# Altium PCB TPcape_breakout.PcbDoc
Units mil, origin at the board's own origin, x right, y up, seen from the top; angles counter-clockwise.
Board outline 2875.01 x 2150.01 mil, 2 copper layers (Top Layer, Bottom Layer); 13 components, 47 nets, 232 pads, 0 vias.
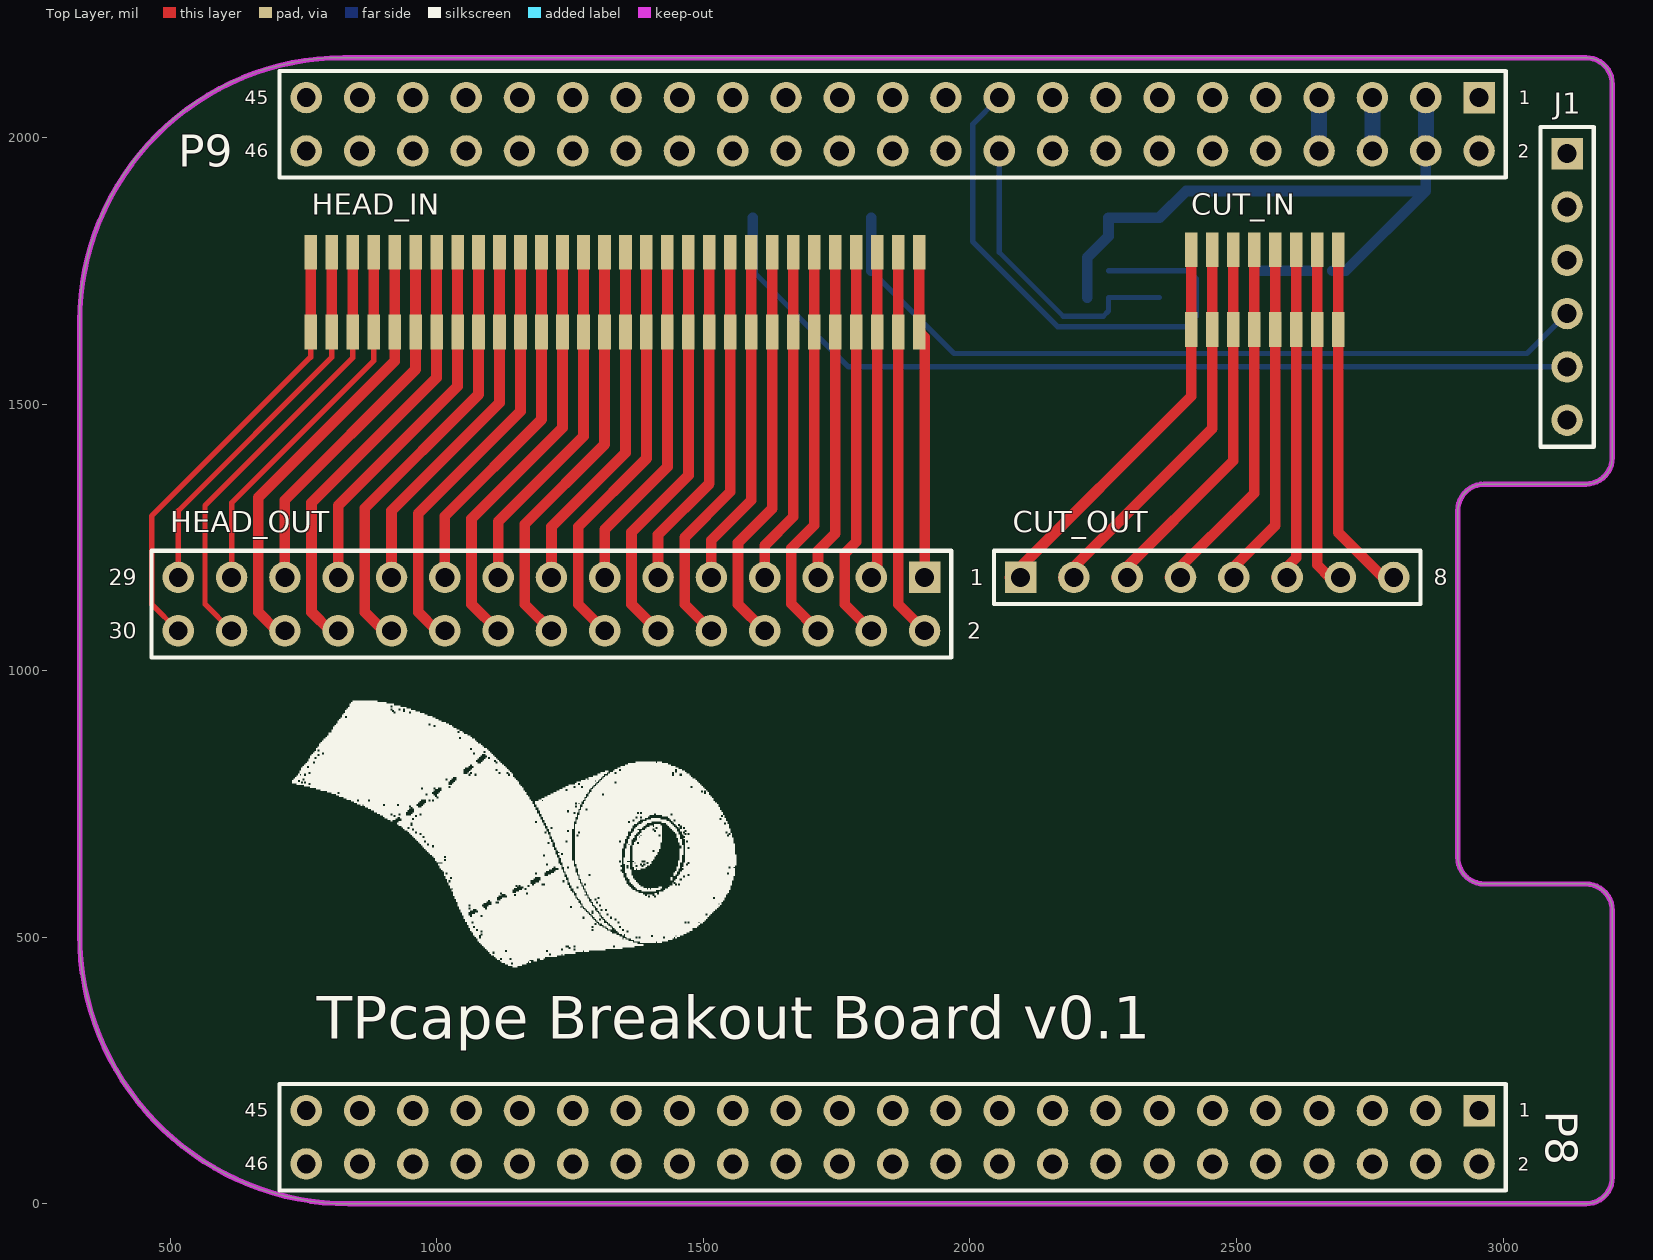
[diagram p0: Top Layer view]
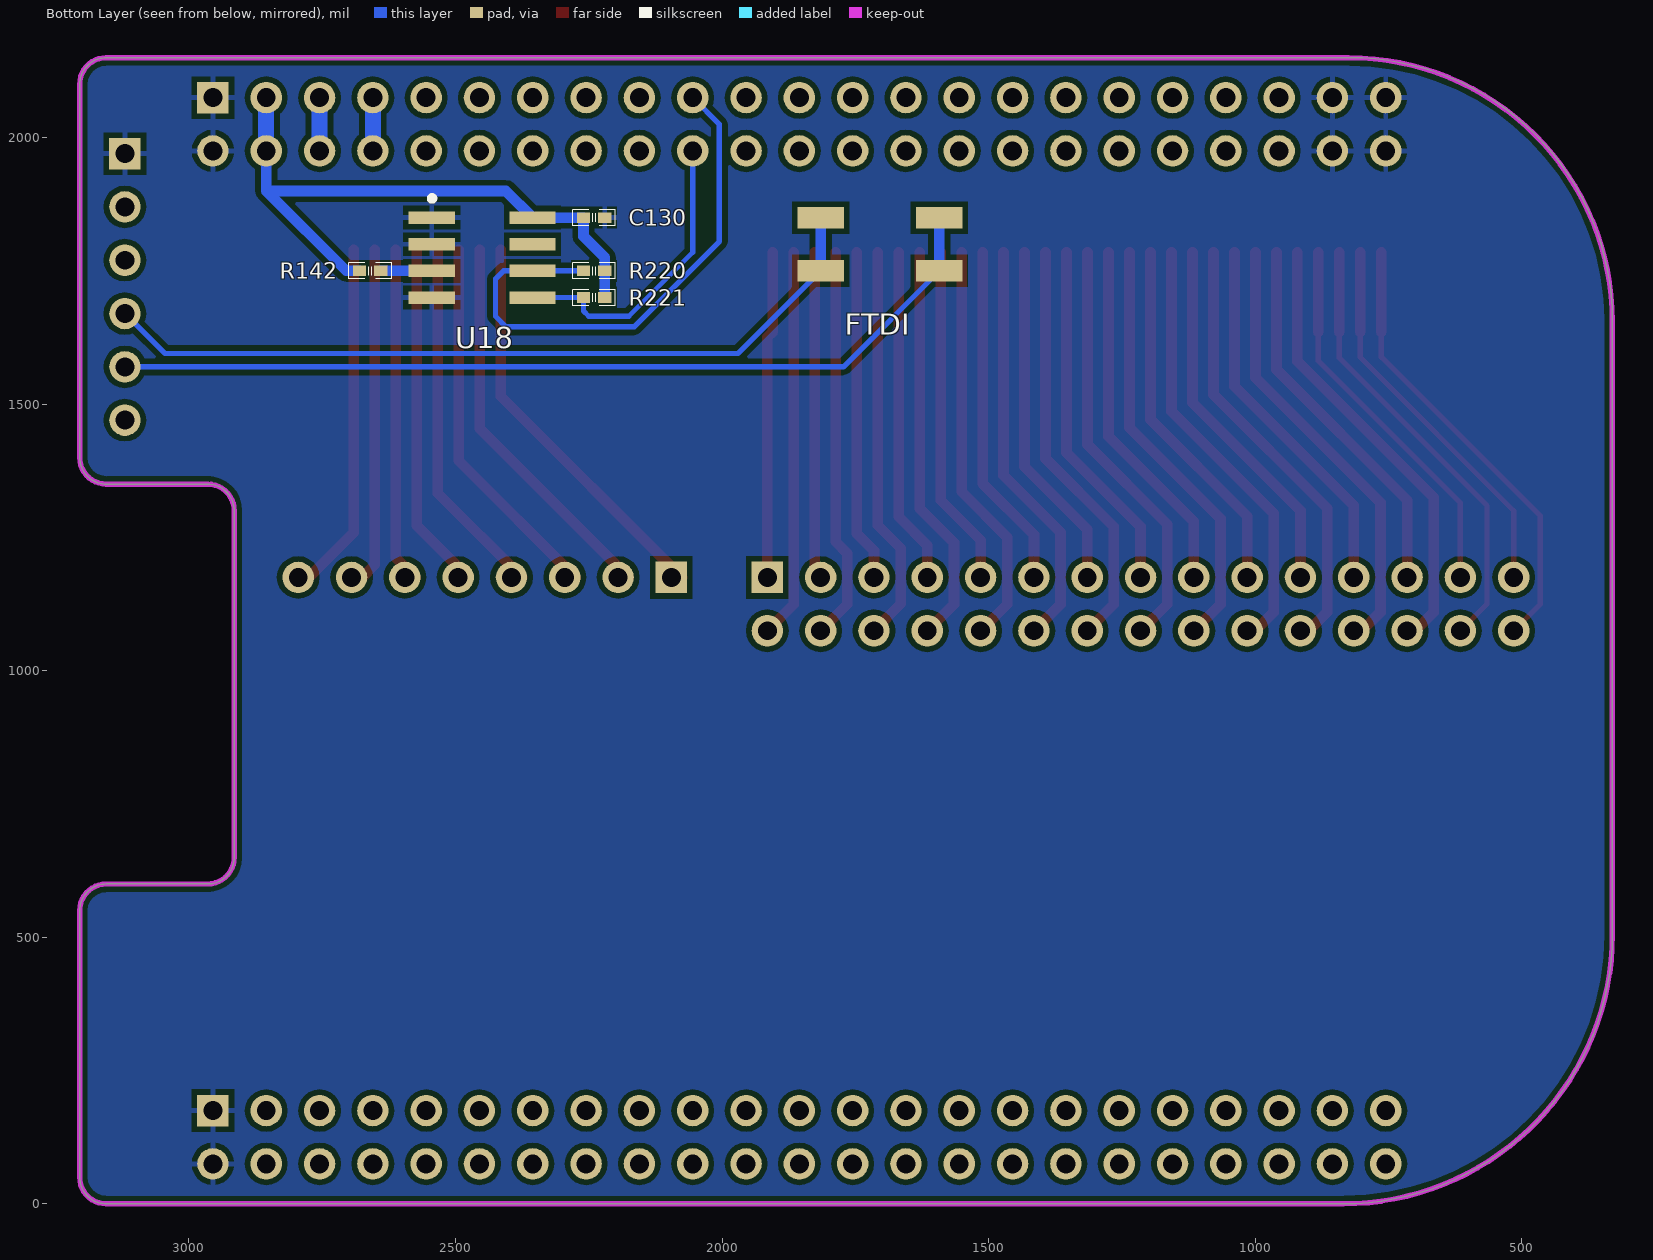
[diagram p1: Bottom Layer view, seen from below]

## Layer stack, top to bottom
Top Solder: solder mask 0.4, Solder Resist, Dk 3.5
Top Layer: signal copper 1.4
Dielectric 1: dielectric 12.6, FR-4, Dk 4.8
Bottom Layer: signal copper 1.4
Bottom Solder: solder mask 0.4, Solder Resist, Dk 3.5

## Board outline
330,505 ccw(c835,505) 835,0 3155,0 ccw(c3155,50) 3205,50 3205,550 ccw(c3155,550) 3155,600 2965,600 cw(c2965,650) 2915,650 2915,1300 cw(c2965,1300) 2965,1350 3155,1350 ccw(c3155,1400) 3205,1400 3205,2100 ccw(c3155,2100) 3155,2150 3154.99,2150.01 822.5,2150.01 ccw(c822.5,1657.5) 329.99,1657.5

## Design rules (kind name [scope] priority, off if disabled: settings)
Clearance [All] p1: gap=10
MinimumSolderMaskSliver [All] p1: minsoldermaskwidth=5
PolygonConnect [All] p1: connectstyle=Relief reliefconductorwidth=10 reliefentries=4 polygonreliefangle="90 Angle" airgapwidth=10
RoomDefinition TPcape_breakout [InComponentClass('TPcape_breakout')] p1: confinementstyle=ConfineIn formatcopy=TRUE lockcomponents=FALSE outline -440,-280 8370,-280 8370,4395 -440,4395
RoutingVias [All] p1: holewidth=28 width=50 viastyle="Through Hole" minholewidth=28 minwidth=50 maxholewidth=28 maxwidth=50
SilkToSolderMaskClearance [IsPad] p1: minsilkscreentomaskgap=4 clearancetoexposedcopper=TRUE
SolderMaskExpansion [All] p1: expansion=4
UnpouredPolygon [All] p1: allowunpoured=FALSE
Width [All] p1: maxlimit=100 minlimit=6 preferedwidth=10 minimp=50.000000 maximp=50.000000 favimp=50.000000
27 further rules are at their usual default settings.

## Components (designator, comment, footprint, x,y, rotation, side; value= is the part's Value field where it differs from the comment)
C130 "0.1uF" 402 2240,1850 r180 bottom
CUT_IN "Molex 52610-0872" "Molex 52610-0872" 2415,1640 r0 top
CUT_OUT "Header 8" HDR1X8 2095,1175 r0 top
FTDI "Header 2X2" SSM-102-S-DV 1815,1850 r270 bottom
HEAD_IN "Molex 52610-3072" "Molex 52610-3072" 1905,1785 r180 top
HEAD_OUT "Header 15X2" HDR2X15 1915,1175 r180 top
J1 "Header 6" HDR1X6 3120,1970 r270 top
P8 "FEMALE HEADER 2x23" HDR2X23 1855,125 r180 top
P9 "FEMALE HEADER 2x23" HDR2X23 1855,2025 r180 top
R142 "4.75k" 402 2660,1750 r0 bottom
R220 "5.6k" 402 2240,1750 r180 bottom
R221 "5.6k" 402 2240,1700 r180 bottom
U18 "CAT24C256WI-GT3" CAT24C256WI-GT3 2450,1775 r180 bottom

## Footprints (in the part's own frame and the unit in brackets; to place one, negate y for a bottom-side part, rotate by r counter-clockwise, add the part's x,y. Pads: shape width x height; smd on the part's side, far side on the other; paste and mask are expansions set on the pad)
402 [mil] "402"
  rect 25x20 smd mask+2: 1(-20,0) 2(20,0)
  silkscreen extent -40,-15 40,15
CAT24C256WI-GT3 [mm] "IC EEPROM 256KBIT 400KHZ 8SOIC"
  rect 2.2x0.6 smd: 1(-2.4,1.905) 2(-2.4,0.635) 3(-2.4,-0.635) 4(-2.4,-1.905) 5(2.4,-1.905) 6(2.4,-0.635) 7(2.4,0.635) 8(2.4,1.905)
  silkscreen extent -2.51,2.69 -2.26,2.94, body extent -2,-2.5 2,2.5, height 1.75
HDR1X6 [mm] "Connector; Header; 6 Position"
  rect 1.5x1.5 hole 0.9: 1(0,0)
  round 1.5 hole 0.9: 2(2.54,0) 3(5.08,0) 4(7.62,0) 5(10.16,0) 6(12.7,0)
  silkscreen extent -1.27,-1.27 13.97,1.27
HDR1X8 [mm] "Connector; Header; 8 Position"
  rect 1.5x1.5 hole 0.9: 1(0,0)
  round 1.5 hole 0.9: 2(2.54,0) 3(5.08,0) 4(7.62,0) 5(10.16,0) 6(12.7,0) 7(15.24,0) 8(17.78,0)
  silkscreen extent -1.27,-1.27 19.05,1.27
HDR2X15 [mm] "Connector; Header; 15x2 Position"
  rect 1.5x1.5 hole 0.9: 1(0,0)
  round 1.5 hole 0.9: 2(0,2.54) 3(2.54,0) 4(2.54,2.54) 5(5.08,0) 6(5.08,2.54) 7(7.62,0) 8(7.62,2.54) 9(10.16,0) 10(10.16,2.54) 11(12.7,0) 12(12.7,2.54) 13(15.24,0) 14(15.24,2.54) 15(17.78,0) 16(17.78,2.54) 17(20.32,0) 18(20.32,2.54) 19(22.86,0) 20(22.86,2.54) 21(25.4,0) 22(25.4,2.54) 23(27.94,0) 24(27.94,2.54) 25(30.48,0) 26(30.48,2.54) 27(33.02,0) 28(33.02,2.54) 29(35.56,0) 30(35.56,2.54)
  silkscreen extent -1.27,-1.27 36.83,3.81
HDR2X23 [mm]
  rect 1.5x1.5 hole 0.9: 1(-27.94,-1.27)
  round 1.5 hole 0.9: 2(-27.94,1.27) 3(-25.4,-1.27) 4(-25.4,1.27) 5(-22.86,-1.27) 6(-22.86,1.27) 7(-20.32,-1.27) 8(-20.32,1.27) 9(-17.78,-1.27) 10(-17.78,1.27) 11(-15.24,-1.27) 12(-15.24,1.27) 13(-12.7,-1.27) 14(-12.7,1.27) 15(-10.16,-1.27) 16(-10.16,1.27) 17(-7.62,-1.27) 18(-7.62,1.27) 19(-5.08,-1.27) 20(-5.08,1.27) 21(-2.54,-1.27) 22(-2.54,1.27) 23(0,-1.27) 24(0,1.27) 25(2.54,-1.27) 26(2.54,1.27) 27(5.08,-1.27) 28(5.08,1.27) 29(7.62,-1.27) 30(7.62,1.27) 31(10.16,-1.27) 32(10.16,1.27) 33(12.7,-1.27) 34(12.7,1.27) 35(15.24,-1.27) 36(15.24,1.27) 37(17.78,-1.27) 38(17.78,1.27) 39(20.32,-1.27) 40(20.32,1.27) 41(22.86,-1.27) 42(22.86,1.27) 43(25.4,-1.27) 44(25.4,1.27) 45(27.94,-1.27) 46(27.94,1.27)
  silkscreen extent -29.21,-2.54 29.21,2.54
"Molex 52610-0872" [mm] "FPC connector for Fujitsu FTP-628MCL401 (Molex 52610-0871 is obsolete)"
  rect 0.6x1.65 smd: 1(0,0) 1(0,3.8) 2(1,0) 2(1,3.8) 3(2,0) 3(2,3.8) 4(3,0) 4(3,3.8) 5(4,0) 5(4,3.8) 6(5,0) 6(5,3.8) 7(6,0) 7(6,3.8) 8(7,0) 8(7,3.8)
  body extent -3.81,-0.34 10.79,4.15, height 5.7
"Molex 52610-3072" [mm] "FPC connector for Fujitsu FTP-628MCL401 print head (Molex 52610-3071 is obsolete)"
  rect 0.6x1.65 smd: 1(0,3.8) 1(0,0) 2(1,3.8) 2(1,0) 3(2,3.8) 3(2,0) 4(3,3.8) 4(3,0) 5(4,3.8) 5(4,0) 6(5,3.8) 6(5,0) 7(6,3.8) 7(6,0) 8(7,0) 8(7,3.8) 9(8,0) 9(8,3.8) 10(9,0) 10(9,3.8) 11(10,0) 11(10,3.8) 12(11,0) 12(11,3.8) 13(12,0) 13(12,3.8) 14(13,0) 14(13,3.8) 15(14,0) 15(14,3.8) 16(15,0) 16(15,3.8) 17(16,0) 17(16,3.8) 18(17,0) 18(17,3.8) 19(18,0) 19(18,3.8) 20(19,0) 20(19,3.8) 21(20,0) 21(20,3.8) 22(21,0) 22(21,3.8) 23(22,0) 23(22,3.8) 24(23,0) 24(23,3.8) 25(24,0) 25(24,3.8) 26(25,0) 26(25,3.8) 27(26,0) 27(26,3.8) 28(27,0) 28(27,3.8) 29(28,0) 29(28,3.8) 30(29,0) 30(29,3.8)
  body extent -3.8,-0.45 32.8,4.05, height 5.7
SSM-102-S-DV [mm] "4-pin 0.1\" recepticle, surface mount for FTDI"
  rect 1.02x2.22 smd: 1(0,0) 2(0,5.65) 3(2.54,0) 4(2.54,5.65)
  body extent -1.27,-0.72 3.81,6.31, height 7.37

## Part data
C130: library part "CAP SMD", "No Description"
CUT_IN: "FPC connector for Fujitsu FTP-628MCL401 (Molex 52610-0871 is obsolete)"
CUT_OUT: "Header, 8-Pin"
FTDI: "Header, 2-Pin, Dual row"
HEAD_IN: "FPC connector for Fujitsu FTP-628MCL401 print head (Molex 52610-3071 is obsolete)"
HEAD_OUT: "Header, 15-Pin, Dual row"
J1: "Header, 6-Pin"
P8 P9: library part HDR_46_F_2_0.1_0.1, "CONN HEADER FMAL 46PS.1\" DL GOLD"
R142 R220 R221: library part "RES SMD", "RES 5.6K OHM 1/16W 5% 0402 SMD"
U18: "IC EEPROM 256KBIT 400KHZ 8SOIC"

## Nets (pads, with @x,y where several pads share a name; then routed paths per layer and width w, separated by ;. In a path a pad name is that pad's centre, name@x,y a point inside that pad or via, vN(x,y) a via of type N, cw(c..) or ccw(c..) an arc to the next point about the centre after c; other vN are vias at no path point)
B_UART0_RX: FTDI.1 FTDI.3 J1.4 | length 1500.3
  Bottom Layer w10: FTDI.3 1970,1595 3045,1595 J1.4
  Bottom Layer w20: FTDI.3 FTDI.1
B_UART0_TX: FTDI.2 FTDI.4 J1.5 | length 1702
  Bottom Layer w10: FTDI.4 1772.56,1570 J1.5
  Bottom Layer w20: FTDI.4 FTDI.2
CLK: HEAD_IN.7 HEAD_OUT.7 | length 632.3
  Top Layer w20: HEAD_OUT.7 1615,1235 1668.78,1288.78 1668.78,1635.39 HEAD_IN.7@1668.78,1785
DI: HEAD_IN.6 HEAD_OUT.6 | length 749
  Top Layer w20: HEAD_IN.6@1708.15,1785 1708.15,1635.39 1708.15,1273.15 1664.53,1229.53 1664.53,1125.47 HEAD_OUT.6
DO: HEAD_IN.22 HEAD_OUT.22 | length 812.8
  Top Layer w20: HEAD_OUT.22@900,1075 865,1110 865,1305 1078.23,1518.23 1078.23,1635.39 HEAD_IN.22@1078.23,1785
GND: C130.2 J1.1 P8.1 P8.2 P9.1 P9.2 P9.43 P9.44 P9.45 P9.46 U18.1 U18.2 U18.4
I2C2_SCL: P9.19 R220.1 U18.6 | length 1026.5
  Bottom Layer w10: P9.19 2005,2025 2005,1805 2165,1645 2405,1645 2425,1665 2425,1735 2410,1750 U18.6 R220.1
I2C2_SDA: P9.20 R221.1 U18.5 | length 569.4
  Bottom Layer w10: P9.20 2055,1785 2175,1665 2250,1665 2260,1675 R221.1 U18.5
LATN: HEAD_IN.21 HEAD_OUT.21 | length 693.9
  Top Layer w20: HEAD_OUT.21 915,1300 1117.6,1502.6 1117.6,1635.39 HEAD_IN.21@1117.6,1785
MTA: HEAD_IN.28 HEAD_OUT.28 | length 845.5
  Top Layer w10: HEAD_OUT.28 565,1125 565,1310 842.01,1587.01 HEAD_IN.28@842.01,1635.39
  Top Layer w20: HEAD_IN.28@842.01,1635.39 HEAD_IN.28@842.01,1785
MTAN: HEAD_IN.27 HEAD_OUT.27 | length 720.3
  Top Layer w10: HEAD_OUT.27 615,1315 881.38,1581.38 HEAD_IN.27@881.38,1635.39
  Top Layer w20: HEAD_IN.27@881.38,1635.39 HEAD_IN.27@881.38,1785
MTB: HEAD_IN.30 HEAD_OUT.30 | length 854.3
  Top Layer w10: HEAD_OUT.30 465,1125 465,1290 763.27,1588.27 HEAD_IN.30@763.27,1635.39
  Top Layer w20: HEAD_IN.30@763.27,1635.39 HEAD_IN.30@763.27,1785
MTBN: HEAD_IN.29 HEAD_OUT.29 | length 729.1
  Top Layer w10: HEAD_OUT.29 515,1300 802.64,1587.64 HEAD_IN.29@802.64,1635.39
  Top Layer w20: HEAD_IN.29@802.64,1635.39 HEAD_IN.29@802.64,1785
NetCUT_IN_1: CUT_IN.1 CUT_OUT.1 | length 755.4
  Top Layer w20: CUT_OUT.1@2075,1175 2415,1515 2415,1640 CUT_IN.1@2415,1789.61
NetCUT_IN_2: CUT_IN.2 CUT_OUT.2 | length 730.3
  Top Layer w20: CUT_OUT.2@2175,1175 2454.37,1454.37 2454.37,1640 CUT_IN.2@2454.37,1789.61
NetCUT_IN_3: CUT_IN.3 CUT_OUT.3 | length 705.2
  Top Layer w20: CUT_OUT.3@2275,1175 2493.74,1393.74 2493.74,1640 CUT_IN.3@2493.74,1789.61
NetCUT_IN_4: CUT_IN.4 CUT_OUT.4 | length 680.1
  Top Layer w20: CUT_OUT.4@2375,1175 2533.11,1333.11 2533.11,1640 CUT_IN.4@2533.11,1789.61
NetCUT_IN_5: CUT_IN.5 CUT_OUT.5 | length 655
  Top Layer w20: CUT_OUT.5@2475,1175 2572.48,1272.48 2572.48,1640 CUT_IN.5@2572.48,1789.61
NetCUT_IN_6: CUT_IN.6 CUT_OUT.6 | length 629.9
  Top Layer w20: CUT_OUT.6@2575,1175 2611.85,1211.85 2611.85,1640 CUT_IN.6@2611.85,1789.61
NetCUT_IN_7: CUT_IN.7 CUT_OUT.7 | length 624.5
  Top Layer w20: CUT_IN.7@2651.22,1789.61 2651.22,1640 2651.22,1198.78 CUT_OUT.7@2675,1175
NetCUT_IN_8: CUT_IN.8 CUT_OUT.8 | length 649.6
  Top Layer w20: CUT_IN.8@2690.59,1789.61 2690.59,1640 2690.59,1259.41 CUT_OUT.8@2775,1175
NetR142_1: R142.1 U18.3 | length 95.5
  Bottom Layer w20: U18.3 R142.1
PHE: HEAD_IN.3 HEAD_OUT.3 | length 614.7
  Top Layer w20: HEAD_OUT.3 1826.26,1186.26 1826.26,1635.39 HEAD_IN.3@1826.26,1785
PHK: HEAD_IN.1 HEAD_OUT.1 | length 614.1
  Top Layer w20: HEAD_IN.1@1905,1785 1905,1635.39 1915,1625.39 HEAD_OUT.1
PIN4: HEAD_IN.4 HEAD_OUT.4 | length 739.8
  Top Layer w20: HEAD_IN.4@1786.89,1785 1786.89,1635.39 1786.89,1241.89 1765,1220 1765,1125 HEAD_OUT.4
PIN5: HEAD_IN.5 HEAD_OUT.5 | length 623.5
  Top Layer w20: HEAD_OUT.5 1715,1225 1747.52,1257.52 1747.52,1635.39 HEAD_IN.5@1747.52,1785
PIN8: HEAD_IN.8 HEAD_OUT.8 | length 757.4
  Top Layer w20: HEAD_OUT.8 1565,1125 1565,1240 1629.41,1304.41 1629.41,1635.39 HEAD_IN.8@1629.41,1785
PIN9: HEAD_IN.9 HEAD_OUT.9 | length 641.1
  Top Layer w20: HEAD_OUT.9 1515,1245 1590.04,1320.04 1590.04,1635.39 HEAD_IN.9@1590.04,1785
PIN14: HEAD_IN.14 HEAD_OUT.14 | length 783.8
  Top Layer w20: HEAD_OUT.14 1265,1125 1265,1270 1393.19,1398.19 1393.19,1635.39 HEAD_IN.14@1393.19,1785
PIN15: HEAD_IN.15 HEAD_OUT.15 | length 667.5
  Top Layer w20: HEAD_OUT.15 1215,1270 1353.82,1408.82 1353.82,1635.39 HEAD_IN.15@1353.82,1785
PIN19: HEAD_IN.19 HEAD_OUT.19 | length 685.1
  Top Layer w20: HEAD_OUT.19 1015,1290 1196.34,1471.34 1196.34,1635.39 HEAD_IN.19@1196.34,1785
PIN20: HEAD_IN.20 HEAD_OUT.20 | length 804
  Top Layer w20: HEAD_OUT.20@1000,1075 965,1110 965,1295 1156.97,1486.97 1156.97,1635.39 HEAD_IN.20@1156.97,1785
PIN23: HEAD_IN.23 HEAD_OUT.23 | length 702.7
  Top Layer w20: HEAD_OUT.23 815,1310 1038.86,1533.86 1038.86,1635.39 HEAD_IN.23@1038.86,1785
PIN24: HEAD_IN.24 HEAD_OUT.24 | length 821.6
  Top Layer w20: HEAD_OUT.24@800,1075 765,1110 765,1315 999.49,1549.49 999.49,1635.39 HEAD_IN.24@999.49,1785
STB1: HEAD_IN.18 HEAD_OUT.18 | length 801.4
  Top Layer w20: HEAD_OUT.18 1065,1125 1065,1285 1235.71,1455.71 1235.71,1635.39 HEAD_IN.18@1235.71,1785
STB2: HEAD_IN.17 HEAD_OUT.17 | length 676.3
  Top Layer w20: HEAD_OUT.17 1115,1280 1275.08,1440.08 1275.08,1635.39 HEAD_IN.17@1275.08,1785
STB3: HEAD_IN.16 HEAD_OUT.16 | length 792.6
  Top Layer w20: HEAD_OUT.16 1165,1125 1165,1275 1314.45,1424.45 1314.45,1635.39 HEAD_IN.16@1314.45,1785
STB4: HEAD_IN.12 HEAD_OUT.12 | length 775
  Top Layer w20: HEAD_OUT.12 1365,1125 1365,1260 1471.93,1366.93 1471.93,1635.39 HEAD_IN.12@1471.93,1785
STB5: HEAD_IN.11 HEAD_OUT.11 | length 649.9
  Top Layer w20: HEAD_OUT.11 1415,1255 1511.3,1351.3 1511.3,1635.39 HEAD_IN.11@1511.3,1785
STB6: HEAD_IN.10 HEAD_OUT.10 | length 766.2
  Top Layer w20: HEAD_OUT.10 1465,1125 1465,1250 1550.67,1335.67 1550.67,1635.39 HEAD_IN.10@1550.67,1785
SW: HEAD_IN.26 HEAD_OUT.26 | length 830.4
  Top Layer w20: HEAD_OUT.26@700,1075 665,1110 665,1325 920.75,1580.75 920.75,1635.39 HEAD_IN.26@920.75,1785
SWN: HEAD_IN.25 HEAD_OUT.25 | length 711.5
  Top Layer w20: HEAD_OUT.25 715,1320 960.12,1565.12 960.12,1635.39 HEAD_IN.25@960.12,1785
SYS_5V: P9.7 P9.8 | length 100
  Bottom Layer w30: P9.8 P9.7
VDD: HEAD_IN.13 HEAD_OUT.13 | length 658.7
  Top Layer w20: HEAD_OUT.13 1315,1265 1432.56,1382.56 1432.56,1635.39 HEAD_IN.13@1432.56,1785
VDD_3V3: C130.1 P9.3 P9.4 R142.2 R220.2 R221.2 U18.8 | length 1194.4
  Bottom Layer w20: R221.2 R220.2 2220,1775 2260,1815 C130.1 U18.8 2405.51,1900 2855,1900 ; R142.2 2705,1750 2855,1900 ; P9.4 2855,1900
  Bottom Layer w30: P9.4 P9.3
VDD_5V: P9.5 P9.6 | length 100
  Bottom Layer w30: P9.6 P9.5
VSEN: HEAD_IN.2 HEAD_OUT.2 | length 730.6
  Top Layer w20: HEAD_IN.2@1865.63,1785 1865.63,1635.39 1865.47,1635.24 1865.47,1124.53 HEAD_OUT.2
pads on no net: J1.2 J1.3 J1.6 P8.3 P8.4 P8.5 P8.6 P8.7 P8.8 P8.9 P8.10 P8.11 P8.12 P8.13 P8.14 P8.15 P8.16 P8.17 P8.18 P8.19 P8.20 P8.21 P8.22 P8.23 P8.24 P8.25 P8.26 P8.27 P8.28 P8.29 P8.30 P8.31 P8.32 P8.33 P8.34 P8.35 P8.36 P8.37 P8.38 P8.39 P8.40 P8.41 P8.42 P8.43 P8.44 P8.45 P8.46 P9.9 P9.10 P9.11 P9.12 P9.13 P9.14 P9.15 P9.16 P9.17 P9.18 P9.21 P9.22 P9.23 P9.24 P9.25 P9.26 P9.27 P9.28 P9.29 P9.30 P9.31 P9.32 P9.33 P9.34 P9.35 P9.36 P9.37 P9.38 P9.39 P9.40 P9.41 P9.42 U18.7

## Polygon pours and split planes (outlines as drawn)
GND on Bottom Layer "Bottom Layer-GND" (solid, remove dead copper, pour order 6): 330,505 ccw(c835,505) 835,0 3155,0 ccw(c3155,50) 3205,50 3205,550 ccw(c3155,550) 3155,600 2965,600 cw(c2965,650) 2915,650 2915,1300 cw(c2965,1300) 2965,1350 3155,1350 ccw(c3155,1400) 3205,1400 3205,2100 ccw(c3155,2100) 3155,2150 825,2150 ccw(c825,1655) 330,1655

## Keep-outs
Keep-Out Layer:
  lines w10: 330,505 ccw(c835,505) 835,0 3155,0 ccw(c3155,50) 3205,50 3205,550 ccw(c3155,550) 3155,600 2965,600 cw(c2965,650) 2915,650 2915,1300 cw(c2965,1300) 2965,1350 3155,1350 ccw(c3155,1400) 3205,1400 3205,2100 ccw(c3155,2100) 3155,2150 825,2150 ccw(c825,1655) 330,1655 330,505

## Silkscreen, mask and mechanical layers (free items; w line width, h text height)
Top Overlay:
  drawing of 8 lines, arcs and shapes, not listed
  text "8" at 2870,1160 h30
  text "TPcape Breakout Board v0.1" at 775,310 h80

## Text inside footprints (layer, text, board x,y; h text height)
HEAD_OUT: Top Overlay "30" at 385,1060 h30; Top Overlay "29" at 385,1160 h30; Top Overlay "2" at 1995,1060 h30; Top Overlay "1" at 2000,1160 h30
P8: Top Overlay "45" at 640,163 h25; Top Overlay "46" at 640,63 h25; Top Overlay "1" at 3029,163 h25; Top Overlay "2" at 3028,62 h25
P9: Top Overlay "45" at 640,2063 h25; Top Overlay "46" at 640,1963 h25; Top Overlay "1" at 3029,2063 h25; Top Overlay "2" at 3028,1962 h25